# Altium PCB MCU.PcbDoc
Units mm, origin at the board's own origin, x right, y up, seen from the top; angles counter-clockwise.
Board outline 47.6 x 56 mm, 2 copper layers (Top Layer, Bottom Layer); 70 components, 74 nets, 262 pads, 137 vias.
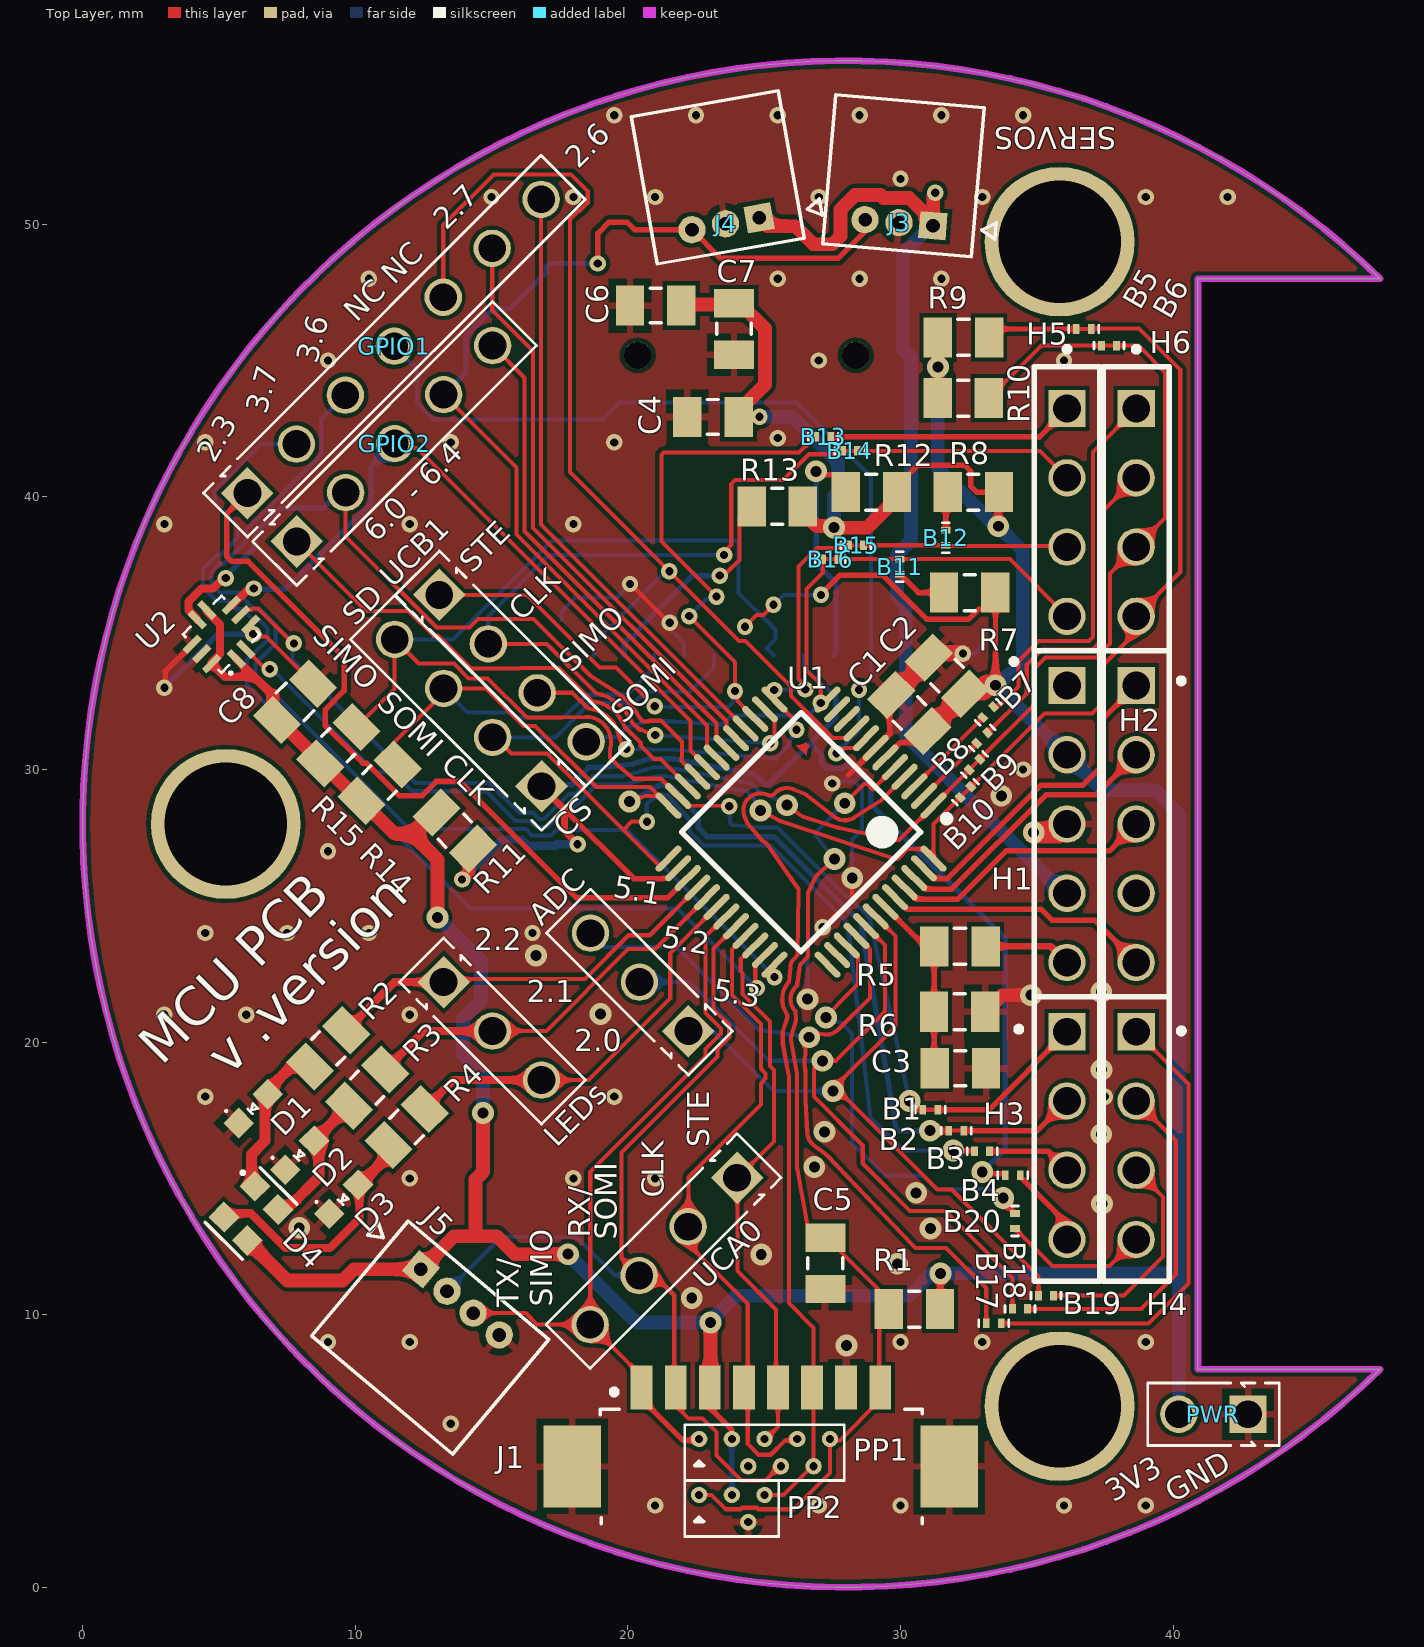
[diagram p0: Top Layer view]
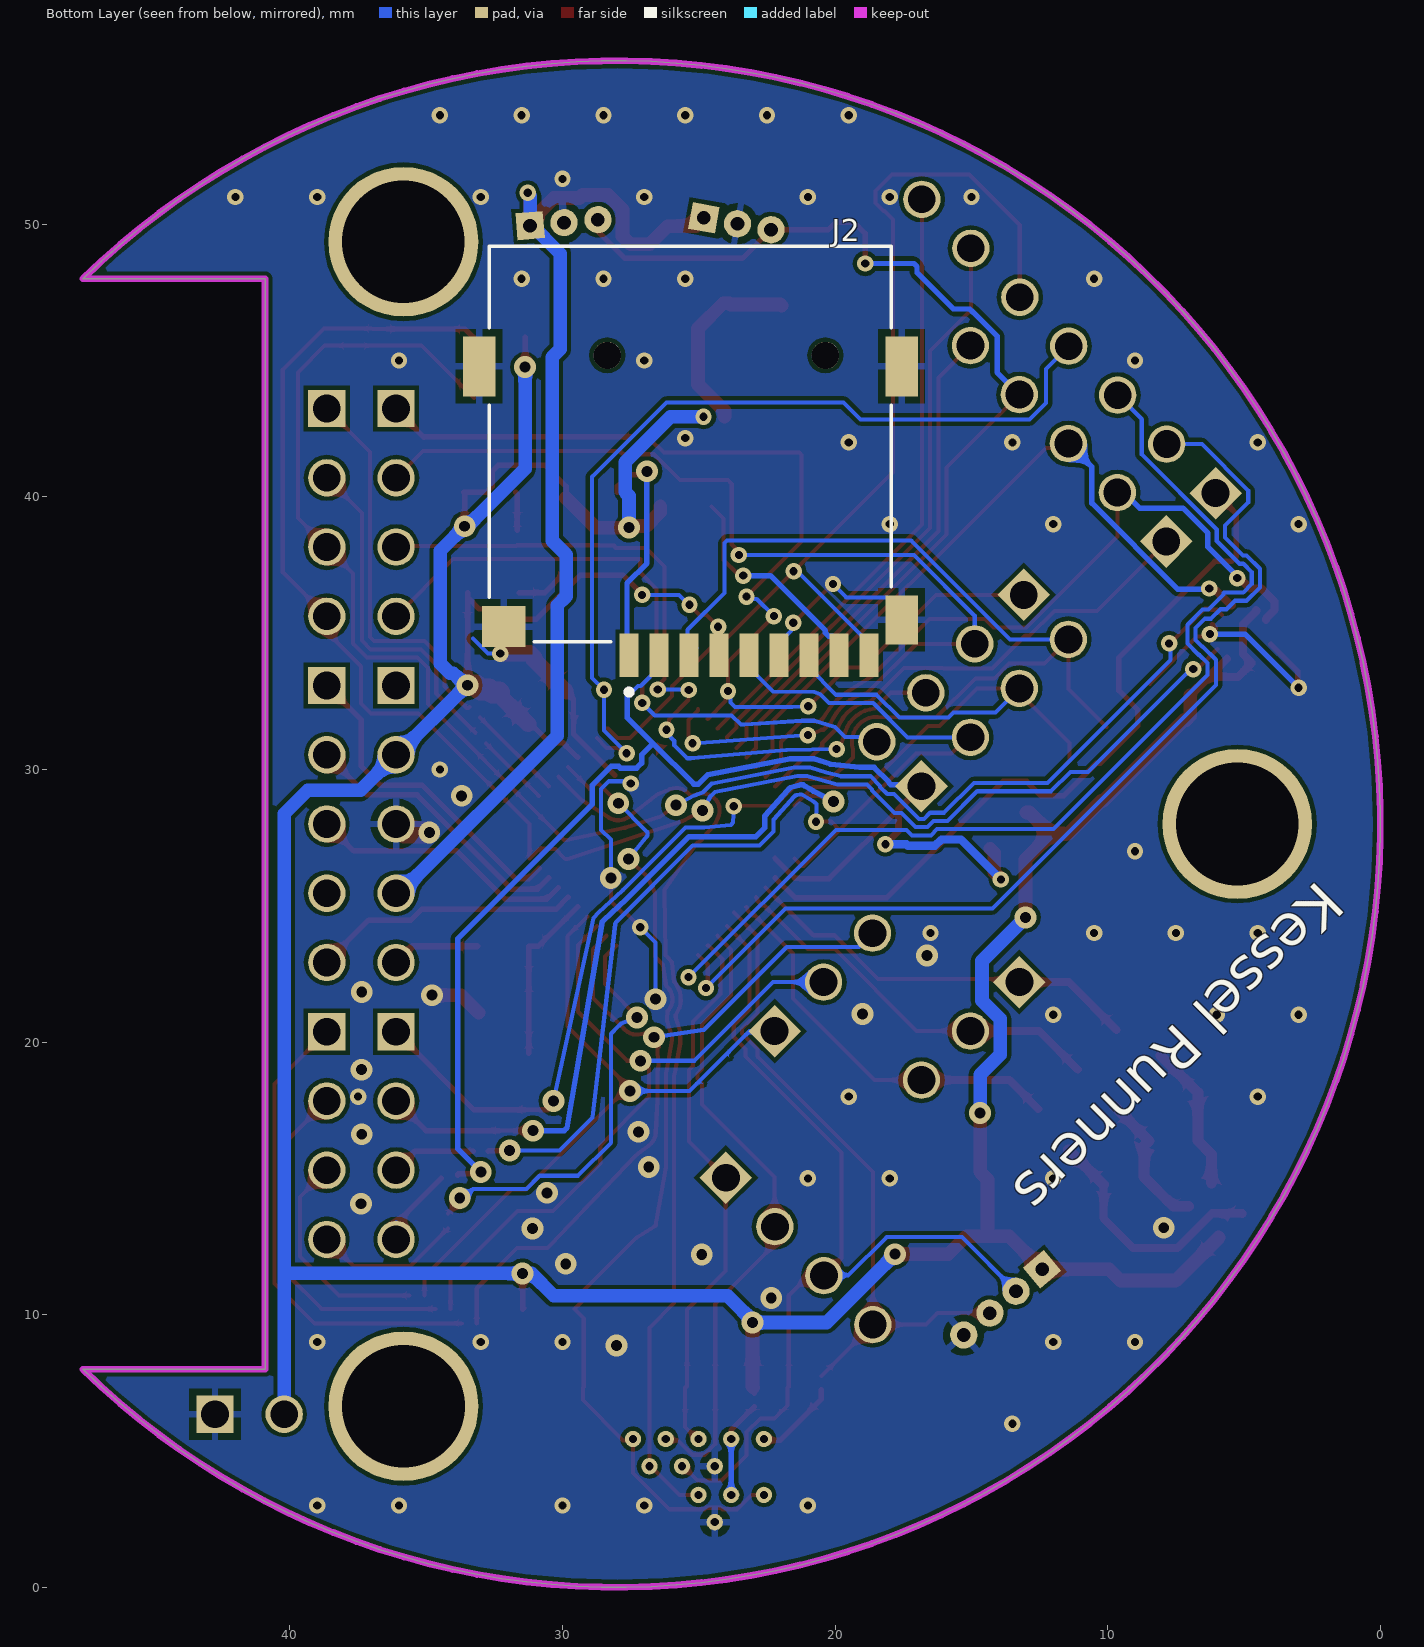
[diagram p1: Bottom Layer view, seen from below]

## Layer stack, top to bottom
Top Solder: solder mask 0.0102, Solder Resist, Dk 3.5
Top Layer: signal copper 0.0356
Dielectric 1: dielectric 0.32, FR-4, Dk 4.8
Bottom Layer: signal copper 0.0356
Bottom Solder: solder mask 0.0102, Solder Resist, Dk 3.5

## Board outline
47.596,8 cw(c28,28) 47.596,48 47.6,48 40.913,48 40.913,8

## Design rules (kind name [scope] priority, off if disabled: settings)
Clearance [All] p1: gap=0.152 ignorepadtopadclearanceinfootprint=FALSE
HoleSize [All] p1: absolutevalues=TRUE maxlimit=6.2 minlimit=0.3 maxpercent=80.000 minpercent=20.000
MinimumAnnularRing [All] p1: minimumring=0.15
MinimumSolderMaskSliver [All] p1: minsoldermaskwidth=0.1
PolygonConnect ViaConnect [IsVia] p1: connectstyle=Direct reliefconductorwidth=0.254 reliefentries=4 polygonreliefangle="90 Angle" airgapwidth=0.254
PolygonConnect [All] p2: connectstyle=Relief reliefconductorwidth=0.254 reliefentries=4 polygonreliefangle="90 Angle" airgapwidth=0.254
RoutingVias [All] p1: holewidth=0.3 width=0.6 viastyle="Through Hole" minholewidth=0.3 minwidth=0.5 maxholewidth=1 maxwidth=5
SilkToSilkClearance [All] p1: silktosilkclearance=0.1
SilkToSolderMaskClearance [IsPad] p1: minsilkscreentomaskgap=0.1 clearancetoexposedcopper=TRUE
SolderMaskExpansion [All] p1: expansion=0.051 istentingtop=FALSE
SupplyNets "Schematic Supply Nets_4" [InNet('1V8')] p1: voltage=0.000
SupplyNets "Schematic Supply Nets_3" [InNet('Vbat')] p2: voltage=0.000
SupplyNets "Schematic Supply Nets_2" [InNet('3V3')] p3: voltage=0.000
SupplyNets "Schematic Supply Nets_1" [InNet('5V')] p4: voltage=0.000
SupplyNets "Schematic Supply Nets" [InNet('GND')] p5: voltage=0.000
Width [All] p1: maxlimit=25.4 minlimit=0.15 preferedwidth=0.3
26 further rules are at their usual default settings.

## Components (designator, comment, footprint, x,y, rotation, side; value= is the part's Value field where it differs from the comment)
ADC "HDR,2.54mm,1x3" HEADER_2.54MM_1x3PIN 20.426,22.199 r135 top
B1 "Solder Jumper Normally Closed 0201" "SOLDER BRIDGE CLOSED 0201" 31.089,17.517 r0 top net-tie
B2 "Solder Jumper Normally Closed 0201" "SOLDER BRIDGE CLOSED 0201" 32.044,16.75 r0 top net-tie
B3 "Solder Jumper Normally Open 0201" "SOLDER BRIDGE OPEN 0201" 32.995,15.99 r0 top
B4 "Solder Jumper Normally Open 0201" "SOLDER BRIDGE OPEN 0201" 34.119,15.118 r0 top
B5 "Solder Jumper Normally Closed 0201" "SOLDER BRIDGE CLOSED 0201" 36.726,46.158 r180 top net-tie
B6 "Solder Jumper Normally Closed 0201" "SOLDER BRIDGE CLOSED 0201" 37.652,45.547 r0 top net-tie
B7 "Solder Jumper Normally Open 0201" "SOLDER BRIDGE OPEN 0201" 33.217,32.101 r225 top
B8 "Solder Jumper Normally Open 0201" "SOLDER BRIDGE OPEN 0201" 32.998,31.153 r225 top
B9 "Solder Jumper Normally Closed 0201" "SOLDER BRIDGE CLOSED 0201" 32.714,30.183 r225 top net-tie
B10 "Solder Jumper Normally Closed 0201" "SOLDER BRIDGE CLOSED 0201" 32.385,29.169 r45 top net-tie
B11 "Solder Jumper Normally Open 0201" "SOLDER BRIDGE OPEN 0201" 29.979,37.438 r270 top
B12 "Solder Jumper Normally Open 0201" "SOLDER BRIDGE OPEN 0201" 31.668,38.5 r270 top
B13 "Solder Jumper Normally Open 0201" "SOLDER BRIDGE OPEN 0201" 27.168,42.21 r0 top
B14 "Solder Jumper Normally Closed 0201" "SOLDER BRIDGE CLOSED 0201" 28.147,41.684 r0 top net-tie
B15 "Solder Jumper Normally Closed 0201" "SOLDER BRIDGE CLOSED 0201" 28.372,38.222 r0 top net-tie
B16 "Solder Jumper Normally Closed 0201" "SOLDER BRIDGE CLOSED 0201" 27.425,37.72 r0 top net-tie
B17 "Solder Jumper Normally Open 0201" "SOLDER BRIDGE OPEN 0201" 33.423,9.683 r0 top
B18 "Solder Jumper Normally Open 0201" "SOLDER BRIDGE OPEN 0201" 34.388,10.212 r0 top
B19 "Solder Jumper Normally Open 0201" "SOLDER BRIDGE OPEN 0201" 35.341,10.703 r0 top
B20 "Solder Jumper Normally Open 0201" "SOLDER BRIDGE OPEN 0201" 34.202,13.437 r270 top
C1 "100nF" CAPACITOR_0805_2012M-70N 30.326,32.071 r315 top
C2 "22uF" CAPACITOR_0805_2012M-70N 31.705,33.443 r315 top
C3 "100nF" CAPACITOR_0805_2012M-70N 32.198,19.041 r180 top
C4 "22uF" CAPACITOR_0805_2012M-70N 23.121,42.937 r0 top
C5 "1nF" CAPACITOR_0805_2012M-70N 27.242,11.884 r90 top
C6 "22uF" CAPACITOR_0805_2012M-70N 21.018,47.016 r0 top
C7 "22uF" CAPACITOR_0805_2012M-70N 23.893,46.159 r90 top
C8 "0.1uF" CAPACITOR_0805_2012M-70N 7.79,32.481 r225 top
D1 "LTST-C190 Series" LED_0603_1608M_0.80MM 6.254,17.561 r45 top
D2 "LTST-C190 Series" LED_0603_1608M_0.80MM 7.958,15.846 r45 top
D3 "LTST-C190 Series" LED_0603_1608M_0.80MM 9.572,14.23 r45 top
D4 "B38G3RGB-10D0003H2U1930" LED_B38G3RGB-10D0003H2U1930_0606_1616M 6.177,13.718 r315 top
GPIO1 "HDR,2.54mm,1x7" HEADER_2.54MM_1x7PIN 11.432,45.527 r45 top
GPIO2 "HDR,2.54mm,1x5" HEADER_2.54MM_1x5PIN 11.445,41.955 r45 top
H1 "SSQ-105-03-S-S" SAMTEC_SSQ-105-03-S-S 36.107,28 r270 top
H2 "SSQ-105-03-S-S" SAMTEC_SSQ-105-03-S-S 38.647,28 r270 top
H3 "SSQ-104-02-S-S" *SAMTEC_SSQ-104-02-S-S_SSQ-104-02-S-S(Primary) 36.107,16.57 r270 top
H4 "SSQ-104-02-S-S" *SAMTEC_SSQ-104-02-S-S_SSQ-104-02-S-S(Primary) 38.647,16.57 r270 top
H5 "SSQ-104-02-S-S" *SAMTEC_SSQ-104-02-S-S_SSQ-104-02-S-S(Primary) 36.107,39.43 r270 top
H6 "SSQ-104-02-S-S" *SAMTEC_SSQ-104-02-S-S_SSQ-104-02-S-S(Primary) 38.647,39.43 r270 top
J1 "0532610871" MOLEX_0532610871 25.505,4.931 r0 top
J2 "MSD-4-A" CUI_MSD-4-A 25.311,41.939 r0 bottom
J3 "0530480310" MOLEX_0530480310 29.947,50.06 r355 top
J4 "0530480310" MOLEX_0530480310 23.582,50.016 r10 top
J5 "0530480410" MOLEX_0530480410 13.844,10.459 r140 top
LEDs "HDR,2.54mm,1x3" HEADER_2.54MM_1x3PIN 15.037,20.403 r315 top
PP1 "Headerless Pogo Holes 8-pin" POGO_8_PIN_HEADER 25.015,4.941 r0 top
PP2 "Headerless Pogo Holes 4-pin" POGO_4_PIN_HEADER 23.815,2.891 r0 top
PWR "HDR,2.54mm,1x2" HEADER_2.54MM_1x2PIN 41.48,6.348 r180 top
R1 "47k" RESISTOR_0805_2012M-50N 30.51,10.203 r0 top
R2 "1K" RESISTOR_0805_2012M-50N 9.005,19.772 r225 top value=1k
R3 "1K" RESISTOR_0805_2012M-50N 10.439,18.328 r225 top value=1k
R4 "1K" RESISTOR_0805_2012M-50N 11.884,16.885 r225 top value=1k
R5 "47k" RESISTOR_0805_2012M-50N 32.183,23.513 r0 top
R6 "47k" RESISTOR_0805_2012M-50N 32.169,21.113 r180 top
R7 "4.7k" RESISTOR_0805_2012M-50N 32.536,36.49 r0 top
R8 "4.7k" RESISTOR_0805_2012M-50N 32.672,40.174 r0 top
R9 "4.7k" RESISTOR_0805_2012M-50N 32.312,45.849 r180 top
R10 "4.7k" RESISTOR_0805_2012M-50N 32.304,43.624 r180 top
R11 "4.7k" Resistor_0805_2012M-50N 13.649,27.756 r135 top
R12 "4.7k" Resistor_0805_2012M-50N 28.932,40.174 r0 top
R13 "4.7k" Resistor_0805_2012M-50N 25.481,39.649 r0 top
R14 "4.7k" Resistor_0805_2012M-50N 10.893,29.52 r225 top
R15 "4.7k" Resistor_0805_2012M-50N 9.38,30.89 r225 top
SD "HDR,2.54mm,1x4" HEADER_2.54MM_1x4PIN 14.139,32.077 r135 top (schematic designator UCA1)
U1 "MSP430FR2355TPT" PT0048A_L 26.352,27.7 r225 top
U2 "BMP390" BMP390 5.091,34.956 r225 top
UCA0 "HDR,2.54mm,1x4" HEADER_2.54MM_1x4PIN 21.313,12.331 r225 top
UCB1 "HDR,2.54mm,1x4" HEADER_2.54MM_1x4PIN 15.777,33.711 r315 top

## Footprints (in the part's own frame and the unit in brackets; to place one, negate y for a bottom-side part, rotate by r counter-clockwise, add the part's x,y. Pads: shape width x height; smd on the part's side, far side on the other; paste and mask are expansions set on the pad)
*SAMTEC_SSQ-104-02-S-S_SSQ-104-02-S-S(Primary) [mm]
  rect 1.37x1.37 hole 1.02: 01(-3.81,0)
  round 1.37 hole 1.02: 02(-1.27,0) 03(1.27,0) 04(3.81,0)
  silkscreen extent -5.34,-1.87 5.34,1.2
BMP390 [mm]
  rect 0.25x0.775 smd mask+0.051: 1(0.25,1.013) 2(-0.25,1.013) 6(-0.25,-1.013) 7(0.25,-1.013)
  rect 0.775x0.25 smd mask+0.051: 3(-1.013,0.5) 4(-1.013,0) 5(-1.013,-0.5) 8(1.013,-0.5) 9(1.013,0) 10(1.013,0.5)
  silkscreen extent -1,-1 1,1.29, body extent -1,-1 1,1, height 0.8
CAPACITOR_0805_2012M-70N [mm] "Capacitor, 0805 (2012 metric), 0.7mm high, nominal pads,"
  rect 1.04x1.47 smd mask+0.051: 1(-0.94,0) 2(0.94,0)
  silkscreen extent -0.2,-0.63 0.2,0.63, body extent -1,-0.73 1,0.73, height 1.23
CUI_MSD-4-A [mm]
  rect 0.7x1.6 smd: 1(2.25,7.75) 2(1.15,7.75) 3(0.05,7.75) 4(-1.05,7.75) 5(-2.15,7.75) 6(-3.25,7.75) 7(-4.35,7.75) 8(-5.45,7.75) CD(-6.55,7.75)
  rect 1.2x1.8 smd: G1(-7.75,6.45)
  rect 1.6x1.5 smd: G2(6.85,6.7)
  rect 1.2x2.2 smd: G3(-7.75,-2.85) G4(7.75,-2.85)
  round 1 hole 1 unplated: ""(-4.95,-3.25) ""(3.05,-3.25)
  silkscreen extent -7.37,-7.25 7.37,9.2, body extent -8.07,-7.37 8.07,7.68, height 1.8
HEADER_2.54MM_1x2PIN [mm]
  rect 1.37x1.37 hole 1.02: 1(-1.27,0)
  round 1.37 hole 1.02: 2(1.27,0)
  silkscreen extent -2.41,-1.14 2.41,1.14, body extent -2.41,-1.14 2.41,1.14, height 8.2
HEADER_2.54MM_1x3PIN [mm]
  rect 1.37x1.37 hole 1.02: 1(-2.54,0)
  round 1.37 hole 1.02: 2(0,0) 3(2.54,0)
  silkscreen extent -3.68,-1.14 3.68,1.14, body extent -3.73,-1.19 3.73,1.19
HEADER_2.54MM_1x4PIN [mm]
  rect 1.37x1.37 hole 1.02: 1(-3.81,0)
  round 1.37 hole 1.02: 2(-1.27,0) 3(1.27,0) 4(3.81,0)
  silkscreen extent -4.95,-1.14 4.95,1.14, body extent -5,-1.19 5,1.19
HEADER_2.54MM_1x5PIN [mm]
  rect 1.37x1.37 hole 1.02: 1(-5.08,0)
  round 1.37 hole 1.02: 2(-2.54,0) 3(0,0) 4(2.54,0) 5(5.08,0)
  silkscreen extent -6.22,-1.14 6.22,1.14, body extent -6.27,-1.19 6.27,1.19
HEADER_2.54MM_1x7PIN [mm]
  rect 1.37x1.37 hole 1.02: 1(-7.62,0)
  round 1.37 hole 1.02: 2(-5.08,0) 3(-2.54,0) 4(0,0) 5(2.54,0) 6(5.08,0) 7(7.62,0)
  silkscreen extent -8.76,-1.14 8.76,1.14, body extent -8.81,-1.19 8.81,1.19
LED_0603_1608M_0.80MM [mm] "LED, 0603 (1608 metric), 0.8mm high"
  rect 0.8x0.8 smd mask+0.051: A(0.75,0) C(-0.75,0)
  silkscreen extent -0.79,-0.12 0.13,0.66, body extent -0.8,-0.4 0.8,0.4, height 0.8
LED_B38G3RGB-10D0003H2U1930_0606_1616M [mm] "RGB LED, 0606 (1616 metric), 0.4mm high"
  rect 0.813x0.8 smd mask+0.051: 1(-0.602,0.8) 2(0.602,0.8) 3(0.602,-0.8) 4(-0.602,-0.8)
  silkscreen extent -1.3,-1.42 0.97,1.42, body extent -0.8,-0.8 0.8,0.8, height 0.4
MOLEX_0530480310 [mm] "Header - Picoblade 03-pin, TH, RA, 4.2mm height"
  rect 1x1 hole 0.5 mask+0.051: 1(1.25,0)
  round 1 hole 0.5 mask+0.051: 2(0,0) 3(-1.25,0)
  silkscreen extent -2.73,-1.02 3.55,4.47, body extent -2.74,-1.04 2.76,4.46, height 3.51
MOLEX_0530480410 [mm]
  rect 1x1 hole 0.5 mask+0.051: 1(1.875,0)
  round 1 hole 0.5 mask+0.051: 2(0.625,0) 3(-0.625,0) 4(-1.875,0)
  silkscreen extent -3.38,-1.05 4.18,4.45, body extent -3.37,-1.03 3.37,4.48, height 3.56
MOLEX_0532610871 [mm] "Header - Picoblade 08-pin, SMT, RA, 3.4mm height"
  rect 0.8x1.6 smd mask+0.051: 1(-5,2.4) 2(-3.75,2.4) 3(-2.5,2.4) 4(-1.25,2.4) 5(0,2.4) 6(1.25,2.4) 7(2.5,2.4) 8(3.75,2.4)
  rect 2.1x3 smd mask+0.051: MP1(-7.55,-0.5) MP2(6.28,-0.5)
  silkscreen extent -6.52,-2.6 5.29,2.33
POGO_4_PIN_HEADER [mm] "4-pin header for pogo pins"
  round 0.6 hole 0.3 mask+0.051: 1(-1.2,0.5) 2(0,0.5) 3(0.6,-0.5) 4(1.2,0.5)
  silkscreen extent -1.73,-1.02 1.72,1.03
POGO_8_PIN_HEADER [mm] "8-pin header for pogo pins"
  round 0.6 hole 0.3 mask+0.051: 1(-2.4,0.5) 2(-1.2,0.5) 3(-0.6,-0.5) 4(0,0.5) 5(0.6,-0.5) 6(1.2,0.5) 7(1.8,-0.5) 8(2.4,0.5)
  silkscreen extent -2.93,-1.02 2.93,1.03
PT0048A_L [mm]
  oval 1.25x0.25 smd paste+0 mask+0.051: 1(-4.125,2.75) 2(-4.125,2.25) 3(-4.125,1.75) 4(-4.125,1.25) 5(-4.125,0.75) 6(-4.125,0.25) 7(-4.125,-0.25) 8(-4.125,-0.75) 9(-4.125,-1.25) 10(-4.125,-1.75) 11(-4.125,-2.25) 12(-4.125,-2.75) 25(4.125,-2.75) 26(4.125,-2.25) 27(4.125,-1.75) 28(4.125,-1.25) 29(4.125,-0.75) 30(4.125,-0.25) 31(4.125,0.25) 32(4.125,0.75) 33(4.125,1.25) 34(4.125,1.75) 35(4.125,2.25) 36(4.125,2.75)
  oval 0.25x1.25 smd paste+0 mask+0.051: 13(-2.75,-4.125) 14(-2.25,-4.125) 15(-1.75,-4.125) 16(-1.25,-4.125) 17(-0.75,-4.125) 18(-0.25,-4.125) 19(0.25,-4.125) 20(0.75,-4.125) 21(1.25,-4.125) 22(1.75,-4.125) 23(2.25,-4.125) 24(2.75,-4.125) 37(2.75,4.125) 38(2.25,4.125) 39(1.75,4.125) 40(1.25,4.125) 41(0.75,4.125) 42(0.25,4.125) 43(-0.25,4.125) 44(-0.75,4.125) 45(-1.25,4.125) 46(-1.75,4.125) 47(-2.25,4.125) 48(-2.75,4.125)
  silkscreen extent -4.25,-3.1 3.1,3.55, body extent -4.5,-4.5 4.5,4.5, height 1.6
RESISTOR_0805_2012M-50N [mm] "Resistor, 0805 (2012 metric), nominal pads"
  rect 1.04x1.47 smd mask+0.051: 1(-0.94,0) 2(0.94,0)
  silkscreen extent -0.2,-0.66 0.2,0.66, body extent -1,-0.63 1,0.62, height 0.5
Resistor_0805_2012M-50N [mm] "Resistor, 0805 (2012 metric), nominal pads"
  rect 1.04x1.47 smd mask+0.051: 1(-0.94,0) 2(0.94,0)
  silkscreen extent -0.2,-0.66 0.2,0.66, body extent -1,-0.63 1,0.62, height 0.5
SAMTEC_SSQ-105-03-S-S [mm]
  rect 1.37x1.37 / inner round 1.37 / far side rect 1.37x1.37 hole 1.02: 1(-5.08,0)
  round 1.37 hole 1.02: 2(-2.54,0) 3(0,0) 4(2.54,0) 5(5.08,0)
  silkscreen extent -6.36,-2.05 6.33,1.2, body extent -6.6,-1.21 6.6,1.21, height 8.51
"SOLDER BRIDGE CLOSED 0201" [mm]
  rect 0.25x0.35 smd paste-100 mask+0: 1(-0.275,0) 2(0.275,0)
  Top Layer lines w0.15: -0.225,0 0.225,0
  silkscreen extent -0.55,-0.13 0.55,0.13
"SOLDER BRIDGE OPEN 0201" [mm]
  rect 0.25x0.35 smd paste-100 mask+0: 1(-0.275,0) 2(0.275,0)
  silkscreen extent -0.55,-0.13 0.55,0.13

## Part data
ADC LEDs: "Connector - 2.54mm, 1x3-pin"
C1 C3: library part "Generic Capacitor", "Generic Capacitor", Capacitance at Rated Voltage=40%, MF Part No.=C0805C104K5RAC7800, Package=0805, Rated Voltage=50V, Supplier 1 Part No.=399-C0805C104K5RAC7800CT-ND, Temperature Coefficient=X7R, Temp Range="-55°C ~ 125°C", Tolerance=±10%, Supplier 1=Digikey
C2: library part C0805C226M9PACTU, "Passive - Capacitor, X5R, 22uF Max, 6.3V, 0805 (2012 Metric), ±20%, -55°C ~ 85°C. 8.8uF @ 5V", Capacitance at Rated Voltage=30%, Package=0402, Rated Voltage=6.3V, Supplier 1 Part No.=399-C0805C226M9PAC7800CT-ND, Temperature Coefficient=X5R, Temp Range="-55°C ~ 85°C", Tolerance=±20%, APSS Standard Part="APSS Standard", MF Part No.=C0805C226M9PACTU, Supplier 1=Digikey
C4 C6 C7: library part GRM21BR61C226ME44L, "Passive - Capacitor, X5R, 22uF Max, 16V, 0805 (2012 Metric), ±20%, -55°C ~ 85°C. 9.4uF @ 5V, 3.2uF @ 15V, 1.9uF @ 25V", Capacitance at Rated Voltage=10%, Package=0805, Rated Voltage=16V, Supplier 1 Part No.=490-10747-1-ND, Temp Range="-55°C ~ 85°C", Temperature Coefficient=X5R, Tolerance=±20%, APSS Standard Part="APSS Standard", MF Part No.=GRM21BR61C226ME44L, Supplier 1=Digikey
C5: library part "Generic Capacitor", "Generic Capacitor", Capacitance at Rated Voltage=100%, MF Part No.=399-C0805C102J5GAC7800CT-ND, Package=0805, Rated Voltage=50V, Temperature Coefficient=X7R, Temp Range="-55°C ~ 125°C", Tolerance=±5%, Supplier 1=Digikey, Supplier 1 Part No.=399-C0805C102J5GAC7800CT-ND
C8: library part "Generic Capacitor", "Generic Capacitor", Capacitance at Rated Voltage=40%, MF Part No.=C0805C104K5RAC7800, Package=0805, Rated Voltage=50V, Supplier 1 Part No.=399-C0805C104K5RAC7800CT-ND, Temp Range="-55°C ~ 125°C", Temperature Coefficient=X7R, Tolerance=±10%, Supplier 1=Digikey
D1: "Diode - LED, 0603", Colour=Green, MF Part No.=LTST-C190KGKT, Package=0603, Rated Voltage="5V Reverse", Temp Range="-30°C ~ 85°C", APSS Standard Part="APSS Standard", Supplier 1=Digikey
D2: "Diode - LED, 0603", Colour=Yellow, MF Part No.=LTST-C190KSKT, Package=0603, Rated Voltage="5V Reverse", Temp Range="-30°C ~ 85°C", APSS Standard Part="APSS Standard", Supplier 1=Digikey
D3: "Diode - LED, 0603", Colour=Red, MF Part No.=LTST-C190KAKT, Package=0603, Rated Voltage="5V Reverse", Temp Range="-30°C ~ 85°C", APSS Standard Part="APSS Standard", Supplier 1=Digikey
D4: "Diode - LED, RGB, 2V Red, 3V Green, 3V Blue 0606 (1616 Metric)", Package=0606, Supplier 1 Part No.=3147-B38G3RGB-10D0003H2U1930CT-ND, Temp Range="-40°C ~ 85°C", APSS Standard Part="APSS Standard", MF Part No.=B38G3RGB-10D0003H2U1930, Supplier 1=Digikey
GPIO1: "Connector - 2.54mm, 1x7-pin"
GPIO2: "Connector - 2.54mm, 1x5-pin"
J1: "Header - Picoblade 08-pin, SMT, RA", Supplier 1 Part No.=WM7626CT-ND, APSS Standard Part="APSS Standard", MF Part No.=0532610871, Mounting Type="Surface Mount", Orientation="Right Angle", Pins=8, Pitch=1.25mm, Supplier 1=Digikey
J2: "Micro SD Card Connector, 9 Positions, Connector and Ejector, Push In, Auto Eject Out, Surface Mount, 1.8 mm Height Above Board, Gold Flash", Package=None, Check_prices=https://www.snapeda.com/parts/MSD-4-A/Same+Sky/view-part/?ref=eda, MF="Same Sky", MP=MSD-4-A, SnapEDA_Link=https://www.snapeda.com/parts/MSD-4-A/Same+Sky/view-part/?ref=snap
J3 J4: "Header - Picoblade 03-pin, TH, RA", Supplier 1 Part No.=WM1743-ND, APSS Standard Part="APSS Standard", MF Part No.=0530480310, Mounting Type=Through-hole, Orientation="Right Angle", Pins=3, Pitch=1.25mm, Supplier 1=Digikey
J5: "Header - Picoblade 04-pin, TH, RA", Supplier 1 Part No.=WM1744-ND, APSS Standard Part="APSS Standard", MF Part No.=0530480410, Mounting Type=Through-hole, Orientation="Right Angle", Pins=4, Pitch=1.25mm, Supplier 1=Digikey
PWR: "Connector - 2.54mm, 1x2-pin"
R1 R6: library part "RMCF0805JT Series", "Passive - Resistor Series, 0805, 5%, 100m - 22M, E24, 0.063W, 1/16W, ±200ppm/°C, -55°C ~ 155°C, 0805 (2012 Metric)", MF Part No.=RMCF0805JT47K0, Package=0805, Power=1/8W, Rated Voltage=150V, Temp Range="-55°C ~ 155°C", Temperature Coefficient=±200ppm/°C, Tolerance=5%, Value Range="100m ~ 22M", APSS Standard Part="APSS Standard", E Series=E24, Supplier 1=Digikey
R2 R3 R4: library part "RMCF0805JT Series", "Passive - Resistor Series, 0805, 5%, 100m - 22M, E24, 0.063W, 1/16W, ±200ppm/°C, -55°C ~ 155°C, 0805 (2012 Metric)", MF Part No.=RMCF0805JT1K00, Package=0805, Power=1/8W, Rated Voltage=150V, Temperature Coefficient=±200ppm/°C, Temp Range="-55°C ~ 155°C", Tolerance=5%, Value Range="100m ~ 22M", APSS Standard Part="APSS Standard", E Series=E24, Supplier 1=Digikey
R5: library part "RMCF0805JT Series", "Passive - Resistor Series, 0805, 5%, 100m - 22M, E24, 0.063W, 1/16W, ±200ppm/°C, -55°C ~ 155°C, 0805 (2012 Metric)", MF Part No.=RMCF0805JT147K0, Package=0805, Power=1/8W, Rated Voltage=150V, Temp Range="-55°C ~ 155°C", Temperature Coefficient=±200ppm/°C, Tolerance=5%, Value Range="100m ~ 22M", APSS Standard Part="APSS Standard", E Series=E24, Supplier 1=Digikey
R7 R8 R9 R10: library part "RMCF0805JT Series", "Passive - Resistor Series, 0805, 5%, 100m - 22M, E24, 0.063W, 1/16W, ±200ppm/°C, -55°C ~ 155°C, 0805 (2012 Metric)", MF Part No.=RMCF0805JT4K70, Package=0805, Power=1/8W, Rated Voltage=150V, Temperature Coefficient=±200ppm/°C, Temp Range="-55°C ~ 155°C", Tolerance=5%, Value Range="100m ~ 22M", APSS Standard Part="APSS Standard", E Series=E24, Supplier 1=Digikey
R11 R12 R13 R14 R15: library part "RMCF0805JT Series", "Passive - Resistor Series, 0805, 5%, 100m - 22M, E24, 0.063W, 1/16W, ±200ppm/°C, -55°C ~ 155°C, 0805 (2012 Metric)", MF Part No.=RMCF0805JT1K00, Package=0805, Power=1/8W, Rated Voltage=150V, Temp Range="-55°C ~ 155°C", Temperature Coefficient=±200ppm/°C, Tolerance=5%, Value Range="100m ~ 22M", APSS Standard Part="APSS Standard", E Series=E24, Supplier 1=Digikey
SD UCA0 UCB1: "Connector - 2.54mm, 1x4-pin"
U1: library part MSP430FR2355IPT, Package=LQFP-48, Rated Voltage="1.8V ~ 3.6V", Supplier 1 Part No.=296-50260-ND, Temp Range="-40°C ~ 105°C (TA)", APSS Standard Part="APSS Standard", MF Part No.=MSP430FR2355TPT, Supplier 1=Digikey
U2: "Digital Pressure Sensor", Package=LGA, Supplier 1 Part No.=828-BMP390CT-ND, Temp Range="-40°C ~ 85°C", APSS Standard Part="APSS Standard", MF Part No.=BMP390, Pins=10, Pressure Range="30 kPa ~ 125 kPa", Supplier 1=Digikey
B1 B2 B3 B4 B5 B6 B7 B8 B9 B10 B11 B12 B13 B14 B15 B16 B17 B18 B19 B20: DEBUG=DEBUG
H1 H2: MP=SSQ-105-03-S-S

## Free pads (board coordinates)
  round 5.5 hole 4.5: 1(5.25,28) 1(35.837,6.643) 1(35.837,49.357)

## Via types
v1: diameter 0.6, hole 0.3, Top Layer to Bottom Layer, tented top, 55 vias
v2: diameter 0.8, hole 0.4, Top Layer to Bottom Layer, tented both sides, 44 vias
v3: diameter 0.6, hole 0.3, Top Layer to Bottom Layer, 21 vias
v4: diameter 0.6, hole 0.3, Top Layer to Bottom Layer, tented both sides, 17 vias

## Nets (pads, with @x,y where several pads share a name; then routed paths per layer and width w, separated by ;. In a path a pad name is that pad's centre, name@x,y a point inside that pad or via, vN(x,y) a via of type N, cw(c..) or ccw(c..) an arc to the next point about the centre after c; other vN are vias at no path point)
1V8: H1.1
1V8_EN: H2.3 U1.45 | length 9.8
  Top Layer w0.2: U1.45 30.574,25.246 32.102,25.246 33.874,27.018 37.665,27.018 H2.3
1V8_PG: H2.1 U1.47 | length 11.9
  Top Layer w0.2: U1.47 31.237,25.997 31.723,25.997 35.15,29.424 36.689,29.424 37.382,30.118 37.382,31.815 H2.1
3V3: C1.2 C2.2 C4.2 C6.2 C7.2 C8.2 D4.3 H1.2 J1.3 J2.4 J5.1 PP1.2 PP2.2 PWR.2 R1.2 R7.2 R8.2 R9.2 R10.2 R11.2 R12.2 R13.2 R14.2 R15.2 U1.6 U2.1 U2.6 U2.10 | length 168
  Top Layer w0.15: v4(24.295,35.239) 24.727,35.671 24.97,35.671 v4(25.341,36.042)
  Top Layer w0.2: J1.3@22.96,6.625 23.815,5.77 PP1.2 PP1.2@23.815,5.391 ; J1.3@22.96,7.125 J1.3 ; v4(27.083,36.404) 27.083,36.442 27.763,37.123 29.352,37.123 30.972,35.503 32.489,35.503 32.873,35.887 33.056,35.887 33.476,36.307 R7.2@33.476,36.459 ; U1.6 29.993,30.988 30.472,30.988 C1.2@31.138,31.654 ; R12.2@29.872,39.959 R12.2 29.872,40.389 30.644,41.161 32.356,41.161 32.574,40.943 32.574,40.391 32.792,40.174 R8.2 ; C1.2@31.141,31.668 C1.2@31.26,31.668 ; R10.2@31.354,43.624 R10.2@31.362,43.632 ; R9.2@31.362,45.849 R10.2@31.362,43.632 ; v2(31.373,44.764) 31.373,43.643 R10.2@31.362,43.632 ; R1.2@31.46,10.203 31.427,10.236 31.467,10.276 v2(31.467,11.515) ; R7.2 R7.2@33.476,36.459 ; v2(33.485,33.089) 33.485,36.45 R7.2@33.476,36.459 ; v2(33.589,38.921) 33.589,40.141 R8.2@33.622,40.174
  Top Layer w0.3: U2.6 4.551,35.814 5.039,35.326 5.039,34.233 4.728,33.922 U2.10 5.223,33.392 6.302,33.392 ; U2.1 6.302,33.392 ; 6.973,32.72 6.302,33.392
  Top Layer w0.5: D4.3@5.923,12.834 7.502,11.255 9.544,11.255 9.953,11.664 J5.1 13.624,12.881 14.409,12.881 ; 6.973,32.72 6.973,31.969 C8.2 7.196,31.817 10.158,28.855 R14.2 11.446,27.637 12.082,27.637 ; R11.2 12.866,28.421 12.082,27.637 ; v2(13.018,24.574) 13.018,26.702 12.082,27.637 ; v2(14.684,17.404) 14.684,15.239 14.409,14.965 14.409,12.881 ; v2(17.803,12.22) 15.855,12.22 15.195,12.881 14.409,12.881 ; C6.2 22,47.057 23.851,47.057 C7.2 24.108,47.099 25.03,46.176 25.03,44.12 24.061,43.152 C4.2 ; J1.3 23.032,7.357 v2(23.032,9.713) ; R13.2 26.421,39.434 26.924,38.931 27.505,38.931 v2(27.562,38.874) ; v2@27.511,38.822 v2(27.562,38.874) ; R12.2@29.872,39.959 28.787,38.874 v2(27.562,38.874)
  Top Layer w0.6: C1.2@31.26,31.668 C2.2
  Top Layer w0.8: C2.2@32.327,32.82 32.582,32.82 32.691,32.93 33.017,32.93 33.176,33.089 v2(33.485,33.089)
  Bottom Layer w0.15: v4(25.341,36.042) 25.359,36.042 25.721,36.404 v4(27.083,36.404)
  Bottom Layer w0.2: PP2.2 PP1.2@23.815,5.391
  Bottom Layer w0.5: v2(13.018,24.574) 14.612,22.979 14.612,21.515 13.95,20.853 13.95,19.536 14.684,18.802 v2(14.684,17.404) ; v2(17.803,12.22) 20.309,9.713 v2(23.032,9.713) 23.032,9.781 23.948,10.697 30.322,10.697 31.14,11.515 v2(31.467,11.515) 40.205,11.515 40.21,11.52 ; v4(24.829,42.937) 26.038,42.937 27.706,41.269 27.706,40.184 27.562,40.04 v2(27.562,38.874) ; v2(31.373,44.764) 31.373,41.034 33.487,38.921 v2(33.589,38.921) 34.484,38.026 34.484,33.883 34.13,33.53 34.006,33.53 33.566,33.089 v2(33.485,33.089) ; v2@33.608,33.048 33.601,33.041 33.601,33.009 36.07,30.54 H1.2 37.412,29.235 39.35,29.235 40.21,28.375 40.21,11.52 ; PWR.2@40.28,6.278 PWR.2 40.21,11.52
3V3_EN: H2.4
3V3_PG: H2.2 U1.46 | length 10.4
  Top Layer w0.2: U1.46 30.917,25.61 31.875,25.61 35.338,29.072 37.179,29.072 H2.2
5V: H1.4 J3.1 J4.1 | length 39.1
  Top Layer w0.5: J4.1 25.115,49.931 26.143,49.931 26.806,49.268 27.507,49.268 27.8,49.561 27.8,50.542 28.328,51.071 29.27,51.071 29.379,50.962 30.321,50.962 30.901,50.382 30.901,50.242 J3.1 31.198,49.957 31.198,51.05 31.274,51.126 v3(31.274,51.153)
  Bottom Layer w0.5: v3(31.274,51.153) 31.274,51.126 31.179,51.031 31.179,50.015 30.085,48.921 30.085,45.423 30.384,45.124 30.384,38.395 29.871,37.881 29.871,36.348 30.198,36.021 30.198,31.24 35.977,25.46 H1.4
5V_EN: H2.5 U1.44 | length 9.8
  Top Layer w0.2: U1.44 30.247,24.866 35.168,24.866 35.56,24.474 37.116,24.474 H2.5@38.659,22.931
ADC9: ADC.1 B19.1 U1.42 | length 25
  Top Layer w0.153: U1.42 29.813,23.885 29.813,20.579 27.474,18.239 27.506,18.207 v2(27.529,18.207) 27.746,18.207 31.362,14.591 31.88,14.591 35.066,11.405 B19.1
  Bottom Layer w0.153: ADC.1 23.147,20.403 25.343,18.207 v2(27.529,18.207)
ADC10: ADC.2 B18.1 U1.41 | length 27.4
  Top Layer w0.153: v2@27.14,19.318 v2(27.14,19.313) ; U1.41 29.435,23.557 29.435,21.115 27.637,19.318 27.241,19.318 v2(27.14,19.313) ; B18.1 34.113,11.342 31.647,13.808 30.349,13.808 28.614,15.542 28.614,16.21 26.824,18.001 26.824,19.039 26.913,19.129 v2(27.14,19.313)
  Bottom Layer w0.153: ADC.2 22.283,22.199 25.164,19.318 27.136,19.318 v2(27.14,19.313)
ADC11: ADC.3 B17.1 U1.40 | length 29.1
  Top Layer w0.153: v2(26.65,20.176) 26.65,20.19 26.726,20.266 v2@26.681,20.311 ; U1.40 28.881,23.403 28.881,21.62 27.753,20.492 27.73,20.469 27.68,20.426 cw(c27.268,20.901) 27.107,20.293 26.927,20.34 26.74,20.34 v2@26.681,20.311 ; B17.1 33.148,10.97 31.669,12.449 30.551,12.449 30.462,12.539 27.294,15.853 ccw(c26.839,15.418) 27.213,15.924 26.836,16.203 cw(c27.21,16.708) 26.582,16.675 26.518,17.875 26.516,18.858 26.507,18.982 26.478,19.158 26.478,19.348 26.516,19.544 26.516,19.782 26.473,19.824 26.473,20.222 26.563,20.311 v2@26.681,20.311
  Bottom Layer w0.153: ADC.3 19.131,23.493 21.775,23.493 24.777,20.491 24.816,20.452 v2(26.65,20.176)
GND: C1.1 C2.1 C3.1 C4.1 C5.1 C6.1 C7.1 C8.1 D1.C D2.C D3.C H1.3 J1.7 J1.MP1 J1.MP2 J2.6 J2.G1 J2.G2 J2.G3 J2.G4 J3.2 J4.2 J5.4 PP1.3 PP2.3 PWR.1 R6.1 U1.7 U2.3 U2.8 U2.9 | length 37.5
  Top Layer w0.15: v3(6.253,34.965) 6.339,34.879 6.721,34.879 C8.1 ; v4(20.08,36.802) 20.098,36.802 21.52,35.38 v4(21.538,35.38) ; v4(27.148,24.209) 27.669,24.73 27.795,24.73 28.229,25.165 v2(28.229,26.022)
  Top Layer w0.2: v1(3,33) 3.027,33.027 3.027,33.6 U2.8 ; U2.3 6.048,35.206 6.048,35.17 v3(6.253,34.965) ; 28.084,29.786 U1.7 29.599,31.301 29.599,32.581 C1.1@29.905,32.887
  Top Layer w0.5: R6.1@33.078,21.073 33.726,21.721 v2(34.792,21.721)
  Top Layer w0.6: C1.1@29.905,32.887 C2.1@31.083,34.065 ; C2.1 31.192,34.259 32.278,34.259 v4(32.288,34.25)
  Top Layer w0.8: v2(34.887,27.685) 35.792,27.685 H1.3
  Bottom Layer w0.15: J2.G1 17.561,35.789 18.086,36.314 19.592,36.314 v4(20.08,36.802) ; v4(21.538,35.38) 21.624,35.294 21.624,35.075 22.061,34.639 J2.6 ; v2(26.594,21.574) 26.594,23.655 v4(27.148,24.209) ; v4(27.499,29.483) 27.585,29.569 28.301,29.569 28.582,29.288 28.582,27.786 28.229,27.434 v2(28.229,26.022) ; v4(32.288,34.25) 32.732,34.25 33.282,34.8
  Bottom Layer w0.2: v1(3,33) 4.965,34.965 v3(6.253,34.965)
  other v1: 21,3 27,3 30,3 36,3 39,3 13.5,6 9,9 12,9 30,9 33,9 39,9 12,15 18,15 21,15 4.5,18 19.5,18 37.5,18 3,21 6,21 12,21 4.5,24 7.5,24 10.5,24 16.5,24 9,27 34.5,30 3,39 12,39 18,39 4.5,42 13.5,42 19.5,42 25.5,42.157 9,45 27,45 36,45 10.5,48 25.5,48 28.5,48 31.5,48 15,51 18,51 21,51 27,51 33,51 39,51 42,51 30,51.664 19.5,54 22.5,54 25.5,54 28.5,54 31.5,54 34.5,54
  other v2: 28.015,8.873 22.343,10.613 29.884,11.866 24.894,12.212 31.099,13.157 7.947,13.188 37.388,14.068 30.575,14.471 26.839,15.418 37.365,16.618 27.21,16.708 37.376,18.987 18.992,21.031 37.365,21.841 16.634,23.175 33.7,29.034
GPIO2.3: GPIO1.1 U1.27 | length 27.9
  Top Layer w0.2: GPIO1.1 5.284,39.379 5.284,37.812 5.465,37.631 6.068,37.631 9.594,34.105 9.594,32.889 8.905,32.2 8.905,31.602 10.275,30.232 10.418,30.232 11.605,29.044 12.462,29.044 12.978,29.561 13.835,29.561 18.1,25.296 21.472,25.296 U1.27
GPIO2.7: GPIO1.4 U1.8 | length 32.7
  Top Layer w0.15: v4(27.649,30.598) 27.771,30.598 27.967,30.794 28.385,30.794 U1.8
  Bottom Layer w0.15: GPIO1.4 12.264,44.694 12.264,43.438 12.863,42.839 19.068,42.839 19.693,43.464 26.186,43.464 28.913,40.737 28.913,33.362 v3(28.478,32.927) 28.478,31.427 v4(27.649,30.598)
GPIO3.4: U1.38
GPIO3.6: GPIO1.3 U1.36 | length 38
  Bottom Layer w0.15: GPIO1.3 8.752,42.847 8.752,41.557 6.002,38.807 6.002,38.379 5.17,37.547 5.029,37.547 4.72,37.238 4.72,36.801 5.029,36.492 5.734,36.492 5.75,36.476 5.75,36.422 6.306,35.866 6.526,35.866 7.083,35.309 7.083,34.622 6.669,34.208 6.646,34.208 6.337,33.899 6.337,33.463 11.99,27.81 16.261,27.81 16.489,27.582 17.178,27.582 17.379,27.783 19.975,27.783 v3(25.377,22.383)
GPIO3.7: GPIO1.2 U1.35 | length 38.3
  Top Layer w0.15: v3(24.739,21.985) 24.673,22.05 24.673,22.84 U1.35
  Bottom Layer w0.15: GPIO1.2 6.549,41.935 4.848,40.233 4.848,39.795 5.7,38.943 5.7,38.504 5.044,37.849 4.903,37.849 4.417,37.363 4.417,36.676 4.903,36.189 5.331,36.189 5.643,35.878 5.867,35.878 6.214,35.531 6.433,35.531 6.78,35.184 6.78,34.747 6.544,34.511 6.52,34.511 6.034,34.025 6.034,33.104 14.231,24.907 21.816,24.907 v3(24.739,21.985)
GPIO5.4: B20.1 U1.39 | length 15.5
  Top Layer w0.153: v2(27.268,20.901) 27.743,21.424 27.823,21.512 28.439,22.128 28.439,23.138 U1.39 ; v2(33.77,14.277) 33.77,14.144 B20.1
  Bottom Layer w0.153: v2(27.268,20.901) 27.855,20.674 27.939,20.591 27.945,20.585 28.225,20.305 28.225,16.305 29.43,15.1 30.836,15.1 31.326,14.61 33.28,14.61 33.601,14.289 v2@33.76,14.289
GPIO6.0: GPIO2.1 U1.22 | length 18.2
  Top Layer w0.15: GPIO2.1 10.402,35.814 11.956,35.814 12.864,34.907 13.027,34.907 14.237,33.697 16.03,33.697 16.059,33.726 17.481,33.726 18.653,32.553 18.688,32.519 cw(c18.471,31.017) 19.886,31.566 20.474,30.978 20.474,30.859 20.953,30.379 21.198,30.379 U1.22
GPIO6.3: GPIO2.4 J3.3 J4.3 U1.19 | length 38.5
  Top Layer w0.15: GPIO2.4 15.913,41.08 15.913,38.613 22.905,31.621 22.905,30.794 U1.19
  Top Layer w0.2: v3(18.896,48.56) 18.896,49.666 19.307,50.077 19.973,50.077 20.25,49.799 J4.3 23.404,48.747 27.714,48.747 28.702,49.735 J3.3
  Bottom Layer w0.2: GPIO2.4 14.057,44.567 14.057,45.893 14.955,46.791 14.967,46.791 15.067,46.891 15.66,46.891 16.997,48.228 16.997,48.443 17.114,48.56 v3(18.896,48.56)
GPIO6.4: GPIO2.5 U1.18 | length 18.3
  Top Layer w0.15: GPIO2.5 16.215,44.369 16.215,38.738 23.258,31.696 23.258,31.148 U1.18
GPIO6.5: GPIO1.6 U1.17 | length 21.7
  Top Layer w0.15: GPIO1.6 15.024,46.851 16.518,45.357 16.518,38.864 23.612,31.77 23.612,31.547 23.965,31.194 U1.17
GPIO6.6: GPIO1.7 U1.16 | length 22.5
  Top Layer w0.15: GPIO1.7 16.82,38.989 24.308,31.501 U1.16
JTAG_TEST/SBW_TCK: J1.6 PP1.7 PP2.4 U1.4 | length 34.8
  Top Layer w0.152: PP2.4 25.715,3.391 26.815,4.491 26.815,7.331 26.815,9.519 25.906,10.427 25.906,18.747 25.869,18.906 25.682,19.949 25.682,20.327 25.682,20.39 25.849,20.907 25.849,20.994 25.778,21.124 cw(c26.594,21.574) 25.906,22.203 25.979,22.913 26.223,23.188 26.224,23.244 26.26,25.486 26.26,25.597 25.098,27.27 25.056,27.312 24.934,27.394 24.389,28.022 24.292,28.233 cw(c24.863,28.495) 25.038,29.098 25.2,29.052 25.273,29.051 25.329,29.061 cw(c25.837,28.691) 26.07,29.275 26.491,29.107 27.568,28.267 ccw(c27.955,28.763) 28.29,28.231 29.267,28.848 29.298,28.879 U1.4
LED_GREEN: LEDs.1 R2.1 U1.28 | length 15
  Top Layer w0.153: LEDs.1@13.272,22.32 18.425,22.32 20.026,23.92 20.804,23.92 U1.28
  Top Layer w0.3: R2.1@9.677,20.444 11.432,22.199 LEDs.1
LED_RED: LEDs.3 R4.1 U1.30 | length 14.8
  Top Layer w0.153: LEDs.3 18.562,18.606 21.552,21.596 21.552,23.254 22.952,24.655 23.031,24.655 23.21,24.834 23.21,24.912 U1.30
  Top Layer w0.3: R4.1 13.605,18.606 LEDs.3
LED_YELLOW/BLUE: LEDs.2 R3.1 U1.29 | length 14.5
  Top Layer w0.153: LEDs.2@15.049,20.412 17.009,20.412 20.01,23.413 21.003,23.413 22.599,25.008 22.678,25.008 22.856,25.187 22.856,25.266 U1.29
  Top Layer w0.3: R3.1 12.514,20.403 LEDs.2
LEDG: D1.A D4.1 R2.2 | length 5.4
  Top Layer w0.4: D4.1@6.191,14.829 6.191,15.881 6.691,16.381 D1.A@6.691,18.158 ; D1.A@6.768,18.214 R2.2@8.054,19.5
LEDR: D3.A D4.4 R4.2 | length 9.1
  Top Layer w0.3: D4.4@5.059,13.698 5.059,13.718 6.177,13.718 7.445,12.45 9.067,12.45 10.152,13.535 D3.A@10.152,14.766
  Top Layer w0.4: D3.A@10.152,14.766 R4.2@11.438,16.052
LEDY/B: D2.A D4.2 R3.2 | length 5.3
  Top Layer w0.4: D4.2@7.043,13.977 7.598,13.977 8.668,15.048 8.668,16.196 D2.A R3.2
NetB1_2: B1.2 H3.01 | length 5.9
  Top Layer w0.2: B1.2 33.244,17.517 H3.01
NetB2_2: B2.2 H3.02 | length 4.2
  Top Layer w0.2: B2.2 35.017,16.75 H3.02
NetB3_2: B3.2 H3.03 | length 3.1
  Top Layer w0.2: B3.2 35.417,15.99 H3.03
NetB4_2: B4.2 H3.04 | length 2.9
  Top Layer w0.2: B4.2@34.454,15.003 H3.04@36.107,13.349
  Bottom Layer w0.2: H3.04 H3.04@36.107,13.349
NetB5_1: B5.1 B10.2 H6.04 | length 23.4
  Top Layer w0.15: B10.2 35.277,32.06 37.034,32.06 37.4,32.427 37.4,33.786 38.647,35.033 H6.04 40.262,37.235 40.262,44.667 38.756,46.173 B5.1@37.005,46.173
NetB5_2: B5.2 R9.1 | length 3.3
  Top Layer w0.2: R9.1@33.262,45.849 33.57,46.158 B5.2
NetB6_1: B6.1 R10.1 | length 4.9
  Top Layer w0.15: R10.1@33.254,43.624 35.177,45.547 B6.1
NetB6_2: B6.2 B9.1 H6.03 | length 20.3
  Top Layer w0.15: B9.1 34.938,32.407 34.938,33.718 35.323,34.103 37.173,34.103 37.683,34.613 37.683,37.196 H6.03 39.708,39.221 39.708,44.565 38.726,45.547 B6.2
NetB7_1: B7.1 H6.01 | length 14.3
  Top Layer w0.15: B7.1 33.447,32.26 33.517,32.26 33.719,32.462 33.745,32.462 34.331,33.048 34.331,33.969 35.069,34.708 36.912,34.708 37.058,34.853 37.058,41.651 H6.01
NetB8_1: B8.1 H6.02 | length 12.7
  Top Layer w0.15: B8.1 34.633,32.788 34.633,33.844 35.194,34.405 37.038,34.405 37.36,34.728 37.36,39.413 H6.02
NetB11_1: B11.1 B16.2 H5.04 | length 9.3
  Top Layer w0.15: B16.2@27.7,37.713 B11.1 34.014,37.713 H5.04
NetB11_2: B11.2 R7.1 | length 1.9
  Top Layer w0.2: B11.2 30.652,36.49 R7.1@31.586,36.49
NetB12_1: B12.1 R8.1 | length 1.4
  Top Layer w0.2: B12.1 31.669,40.121 R8.1@31.722,40.174
NetB12_2: B12.2 B15.2 H5.03 | length 7.5
  Top Layer w0.15: B15.2 28.648,38.224 31.667,38.224 B12.2 31.701,38.192 36.075,38.192 H5.03
NetB13_2: B13.2 H5.01 | length 9
  Top Layer w0.2: B13.2@27.502,42.202 35.07,42.202 35.085,42.187 H5.01@36.116,43.218
NetB14_2: B14.2 H5.02 | length 8.1
  Top Layer w0.15: B14.2 35.123,41.684 H5.02
NetB17_2: B17.2 H4.01 | length 17.5
  Top Layer w0.15: B17.2 39.1,9.683 40.561,11.144 40.561,18.466 H4.01
NetB18_2: B18.2 H4.02 | length 12.9
  Top Layer w0.153: B18.2 38.83,10.212 40.098,11.481 40.098,16.389 H4.02
NetB19_2: B19.2 H4.03 | length 8.2
  Top Layer w0.15: B19.2 38.197,10.703 39.625,12.131 39.625,14.322 H4.03
NetB20_2: B20.2 H4.04 | length 5.4
  Top Layer w0.153: B20.2 35.58,11.784 37.671,11.784 H4.04
NetJ2_1: J2.1 R12.1 | length 8.6
  Top Layer w0.2: v2(26.904,40.936) 27.066,40.936 27.194,40.809 27.572,40.809 27.992,40.389 R12.1
  Bottom Layer w0.2: v2(26.904,40.936) 26.904,39.364 26.91,39.358 26.91,37.558 27.635,36.833 27.635,34.263 J2.1
NetJ2_8: J2.8 R13.1 | length 8.1
  Top Layer w0.15: v4(23.369,37.112) 23.455,37.199 23.607,37.199 24.096,37.687 24.096,39.204 R13.1
  Bottom Layer w0.2: J2.8 19.861,34.639 20.111,34.889 20.241,34.889 20.358,35.006 20.358,35.093 22.377,37.112 v4(23.369,37.112)
"P2.6 / SD_CardDetect": GPIO1.5 J2.CD U1.9 | length 38.8
  Top Layer w0.15: GPIO1.5 13.228,49.974 15.082,51.827 17.918,51.827 18.527,51.218 18.527,50.782 18.228,50.483 18.192,50.483 17.884,50.174 17.884,40.904 24.076,34.711 24.321,34.711 25.98,33.052 25.98,32.7 27.533,31.148 27.985,31.148 28.338,31.501 U1.9
  Bottom Layer w0.15: J2.CD 18.761,34.639 21.308,37.186 21.438,37.186 v4(21.524,37.272)
"P4.0 / SD_CS": B4.1 J2.2 R11.1 SD.1 U1.26 | length 50.6
  Top Layer w0.2: 17.681,28.535 20.219,25.997 21.293,25.997 21.307,26.012 21.481,26.012 U1.26 U1.26@22.207,26.738 ; v2(32.998,15.239) 33.058,15.178 33.819,15.178 33.844,15.153 B4.1
  Top Layer w0.254: SD.1 17.681,28.535 17.681,27.742 18.157,27.265 v3(18.157,27.256)
  Top Layer w0.5: v3(13.92,25.963) 13.92,25.991 14.162,26.232 14.162,26.94 R11.1
  Bottom Layer w0.15: J2.2 26.461,33.739 27.131,33.068 27.233,33.068 27.629,32.672
  Bottom Layer w0.2: SD.1 17.661,29.383 17.718,29.44 17.953,29.44 18.024,29.51 18.024,29.534 18.57,30.08 19.098,30.08 20.175,30.196 20.778,30.393 21.651,30.393 24.675,29.804 24.733,29.746 25.02,29.459 25.186,29.459 26.683,30.957 ; 27.629,32.672 27.629,31.902 26.683,30.957 ; v2(32.998,15.239) 33.844,16.085 33.844,23.796 28.909,28.731 28.909,29.423 28.219,30.113 27.946,30.113 27.878,30.046 27.285,30.046 27.1,30.231 27.1,30.54 26.683,30.957
  Bottom Layer w0.3: v3(13.92,25.963) 15.389,27.432 16.105,27.432 16.332,27.204 17.334,27.204 17.386,27.256 v3(18.157,27.256)
"P6.1 / BMP_INT": GPIO2.2 U1.21 U2.7 | length 27.4
  Top Layer w0.15: GPIO2.2 9.649,38.549 12.989,35.209 14.189,35.209 14.501,35.522 16.54,35.522 18.62,33.442 19.612,32.807 cw(c18.471,31.017) 20.226,32.211 20.473,31.848 20.561,31.76 20.754,31.76 20.783,31.789 21.22,31.789 21.992,31.016 21.992,30.453 21.974,30.435 21.974,30.311 U1.21
  Top Layer w0.3: U2.7 4.198,35.531 3.886,35.842 3.886,36.16 4.36,36.634 4.78,36.634 5.166,37.019 v3(5.247,37.019)
  Bottom Layer w0.2: v3(5.247,37.019) 5.247,37.083 6.33,38.165 6.33,38.671 7.243,39.584 8.831,39.584 9.406,40.159 GPIO2.2
"P6.2 / BMP_ADR": GPIO2.3 U1.20 U2.5 | length 26.3
  Top Layer w0.15: GPIO2.3 11.602,41.799 12.267,41.799 22.295,31.771 22.295,30.697 U1.20
  Top Layer w0.3: U2.5 5.489,36.026 6.046,36.584 6.22,36.584 v3(6.277,36.641)
  Bottom Layer w0.2: v3(6.277,36.641) 6.308,36.61 7.425,36.61 10.587,39.771 10.587,41.097 GPIO2.3
Reset/SBW_TDIO: C5.2 J1.8 PP1.8 PP2.1 R1.1 U1.5 | length 36.5
  Top Layer w0.152: PP2.1 23.067,3.391 23.596,2.862 24.138,2.862 24.196,2.919 24.738,2.919 24.796,2.862 26.078,2.862 27.415,4.199 27.415,5.391 27.779,5.391 29.255,6.867 J1.8 ; 26.22,15.308 26.583,13.268 27.286,12.824 29.229,10.882 29.229,10.534 29.56,10.203 29.22,9.864 J1.8@29.22,7.348 ; 26.22,15.308 cw(c26.839,15.418) 26.211,15.418 26.211,18.848 26.173,19.032 25.986,20.075 25.986,20.201 26.171,20.779 26.171,20.866 26.154,21.12 26.106,21.179 cw(c26.594,21.574) 26.166,22.034 26.178,22.045 26.197,22.064 26.215,22.127 26.314,22.827 26.32,22.836 26.357,22.881 26.418,22.942 26.462,22.986 26.61,23.133 26.61,25.385 26.61,25.476 26.88,26.056 26.944,26.12 27.069,26.237 v2(27.582,26.721) ; v2(27.955,28.763) 28.456,29.26 28.661,29.463 28.787,29.463 28.981,29.269 U1.5
  Bottom Layer w0.152: v2(27.582,26.721) 26.888,27.57 26.888,27.624 26.888,27.696 26.933,27.741 v2(27.955,28.763)
SD_CLK: B3.1 J2.5 SD.2 U1.25 | length 41
  Top Layer w0.15: SD.2 15.125,31.179 15.724,30.579 17.039,30.579 19.835,27.783 ; v4(20.704,28.085) 20.137,28.085 19.835,27.783 ; U1.25 21.222,26.46 21.157,26.46 19.835,27.783
  Top Layer w0.2: v2(31.939,16.025) 31.956,16.007 32.703,16.007 B3.1
  Bottom Layer w0.15: SD.2 17.343,31.179 18.602,32.438 20.231,32.438 20.564,32.771 20.768,32.844 22.281,32.859 23.161,33.739 J2.5 ; v4(20.704,28.085) 20.691,28.673 20.691,28.674 20.691,28.738 20.748,28.795 21.234,29.089 21.294,29.089 21.428,29.055 21.469,29.045 21.499,29.016 21.502,29.013 22.255,28.169 22.255,27.728 22.77,27.212 25.225,27.212 25.269,27.168 28.06,24.377 28.066,24.326 28.908,17.234 28.944,17.197 30.117,16.025 v2(31.939,16.025)
SD_MISO: B2.1 J2.7 R14.1 SD.3 U1.24 | length 44.7
  Top Layer w0.15: R14.1 11.406,30.336 11.406,30.966 13.241,32.801 SD.3 14.796,32.975 16.172,31.598 16.6,31.598 18.841,29.358 20.805,29.358 U1.24@21.137,29.026 ; v2(20.061,28.829) 20.635,29.026 U1.24@21.137,29.026 ; U1.24 U1.24@21.137,29.026
  Top Layer w0.2: v2(31.084,16.75) B2.1
  Bottom Layer w0.15: SD.3 14.125,32.091 15.659,32.091 15.849,31.901 17.637,31.901 18.477,32.74 19.962,32.74 20.961,33.739 J2.7
  Bottom Layer w0.2: v2(20.061,28.829) 20.799,29.209 21.127,29.407 21.174,29.435 21.255,29.435 21.644,29.339 21.684,29.3 21.74,29.238 22.582,28.293 22.582,27.863 22.906,27.54 25.361,27.54 27.649,25.252 28.497,24.464 28.542,24.419 29.836,16.854 29.94,16.75 v2(31.084,16.75)
SD_MOSI: B1.1 J2.3 R15.1 SD.4 U1.23 | length 52.9
  Top Layer w0.15: R15.1 11.445,32.955 SD.4 12.329,33.887 13.619,33.887 14.162,33.344 14.854,33.344 16.297,31.901 17.499,31.901 17.559,31.901 18.442,31.929 cw(c18.471,31.017) 19.339,30.735 19.339,30.443 19.644,30.138 20.216,29.66 20.278,29.66 21.21,29.66 22.217,28.654 22.197,28.673 v4(23.718,28.654)
  Top Layer w0.2: v2(30.329,17.845) 30.536,17.517 B1.1
  Bottom Layer w0.15: SD.4 13.585,34.771 17.21,38.396 23.971,38.396 24.059,38.308 24.059,36.478 25.411,35.126 25.411,34.789 25.086,34.464 J2.3 ; v4(23.718,28.654) 23.741,28.051 23.778,28.013 23.788,28.003 23.822,27.969 24.8,27.87 ccw(c24.863,28.495) 24.863,27.867 25.496,27.867 27.784,25.579 ccw(c28.229,26.022) 27.802,25.562 28.675,24.749 28.87,24.554 v2(30.329,17.845)
UCA0_CLK/JTAG_TMS: J1.4 PP1.6 U1.33 UCA0.2 | length 23.6
  Top Layer w0.15: U1.33 23.82,23.401 23.82,21.73 24.883,20.667 24.883,19.022 25.056,18.849 25.056,18.661 24.883,18.488 24.883,17.717 22.22,15.054 22.22,13.229 22.22,12.573 24.399,10.394 24.399,7.331 24.399,5.26 24.796,4.863 25.241,4.863 25.769,5.391 PP1.6@26.215,5.391
UCA0_RX/MISO/JTAG_TDI: J1.2 J5.2 PP1.5 U1.32 UCA0.3 | length 35.3
  Top Layer w0.15: UCA0.3 19.765,12.083 19.765,15.95 23.283,19.469 23.283,19.746 23.72,20.183 23.72,20.622 23.148,21.194 23.148,23.436 U1.32 ; UCA0.3@20.436,11.979 21.701,10.714 J1.2@21.701,7.344 ; J1.2 21.755,6.675 22.231,6.199 22.744,6.199 23.249,5.694 23.249,4.832 24.168,3.913 24.633,3.913 24.639,3.919 25.043,3.919 PP1.5@25.615,4.491
  Bottom Layer w0.15: J5.2 15.352,12.848 18.106,12.848 19.505,11.449 20.398,11.449 UCA0.3
UCA0_STE/JTAG_TCK: J1.5 PP1.4 U1.34 UCA0.1 | length 20.2
  Top Layer w0.15: U1.34 24.646,23.546 24.142,23.042 24.142,22.605 24.211,22.535 24.211,21.766 25.215,20.762 25.215,19.118 25.359,18.975 25.359,16.355 24.018,15.014 24.018,11.597 25.433,10.182 J1.5@25.433,7.371 ; PP1.4@25.015,5.391 25.505,5.881 J1.5
UCA0_TX/MOSI/JTAG_TDO: J1.1 J5.3 PP1.1 U1.31 UCA0.4 | length 27.9
  Top Layer w0.15: J5.3 16.254,10.057 16.674,9.637 UCA0.4 ; J1.1@20.505,7.75 UCA0.4 ; U1.31@23.716,24.753 22.846,23.883 22.846,21.069 23.418,20.497 23.418,20.308 22.981,19.872 22.85,19.741 22.85,19.464 18.619,15.232 UCA0.4
  Top Layer w0.2: J1.1@20.505,7.25 20.505,6.915 22.03,5.391 PP1.1@22.615,5.391
UCB0_CLK: B8.2 U1.2 | length 2.7
  Top Layer w0.15: U1.2 30.872,29.026 B8.2
UCB0_SCL/MISO: B10.1 U1.48 U2.2 | length 32.3
  Top Layer w0.15: U2.2 6.633,33.767 6.778,33.767 v3(6.864,33.681) ; v2(24.863,28.495) 25.506,28.151 25.584,28.117 ccw(c25.837,28.691) 25.639,28.096 29.811,26.714 29.896,26.714 29.94,26.758 30.263,27.082 30.86,27.082 U1.48 31.213,28.002 31.218,28.002 B10.1
  Bottom Layer w0.15: v3(6.864,33.681) 6.951,33.681 10.718,29.914 11.374,29.914 12.086,29.202 14.788,29.202 15.878,28.112 16.386,28.112 16.614,27.884 17.053,27.884 17.574,28.405 17.824,28.405 18.654,29.235 18.654,29.273 18.831,29.45 19.916,29.45 21.039,29.763 21.39,29.763 24.414,29.174 24.483,29.105 24.571,29.017 v2(24.863,28.495)
UCB0_SDA/MOSI: B9.2 U1.1 U2.4 | length 32.8
  Top Layer w0.15: U2.4 5.993,35.858 6.201,35.858 6.252,35.909 6.44,35.909 7.725,34.624 v3(7.748,34.624) ; v2(25.837,28.691) 26.404,28.275 27.674,27.874 ccw(c27.955,28.763) 27.758,27.852 29.841,27.406 29.947,27.406 U1.1 32.519,29.979 B9.2
  Bottom Layer w0.15: v3(7.748,34.624) 7.692,34.568 7.692,34.024 12.211,29.505 14.913,29.505 16.004,28.414 16.512,28.414 16.739,28.187 16.928,28.187 17.839,29.098 18.089,29.098 18.351,29.36 18.351,29.398 18.706,29.752 19.791,29.752 20.326,29.883 20.914,30.065 21.515,30.065 24.494,29.486 24.539,29.477 24.857,29.16 25.065,29.089 cw(c24.863,28.495) 25.156,29.05 v2(25.837,28.691)
UCB0_STE: B7.2 U1.3 | length 3.6
  Top Layer w0.15: U1.3 30.506,29.39 B7.2
UCB1_CLK: B14.1 U1.14 UCB1.2 | length 31.1
  Top Layer w0.15: UCB1.2 17.025,34.609 18.797,32.837 18.834,32.8 cw(c18.471,31.017) 20.08,31.868 20.157,31.723 20.422,31.458 20.5,31.458 20.968,31.233 20.973,31.233 v3(21.001,31.261) ; v4(23.531,37.869) 23.531,37.99 23.794,38.253 23.794,40.478 23.927,40.611 25.691,40.611 26.644,41.564 27.752,41.564 27.772,41.584 27.822,41.584 27.872,41.634 B14.1 ; U1.14 25.026,32.162 25.379,31.809 25.379,31.233 25.228,31.082 v3(25.228,30.96)
  Bottom Layer w0.15: UCB1.2 14.879,35.638 17.11,37.869 v4(23.531,37.869) ; v3(21.001,31.261) v3(25.228,30.96)
UCB1_MISO/SCL: B16.1 U1.12 UCB1.4 | length 14.9
  Top Layer w0.15: v3(27.076,32.443) 27.076,33.114 26.555,33.635 26.555,36.623 27.15,37.217 B16.1
  Bottom Layer w0.15: UCB1.4 18.643,31.189 19.641,31.189 20.013,31.561 20.783,31.789 21.22,31.789 23.335,31.649 23.46,31.649 23.796,31.984 26.618,31.984 v3(27.076,32.443)
UCB1_MOSI/SDA: B15.1 U1.13 UCB1.3 | length 20.6
  Top Layer w0.15: UCB1.3 17.966,32.813 18.511,32.268 18.549,32.229 cw(c18.471,31.017) 19.626,31.396 19.849,30.716 19.914,30.716 v3(19.946,30.748) ; U1.13 25.379,32.558 26.098,31.84 26.098,31.543 v3(26.184,31.457) ; v4(26.508,32.936) 26.508,33.058 26.253,33.313 26.253,37.444 26.931,38.122 28.047,38.122 28.097,38.172 B15.1
  Bottom Layer w0.15: v3(19.946,30.748) 21.787,30.72 25.01,30.433 25.303,30.413 25.427,30.413 25.903,30.889 25.903,31.054 26.184,31.335 v3(26.184,31.457) ; v4(25.37,32.917) 25.39,32.936 v4(26.508,32.936)
UCB1_STE: B13.1 U1.15 UCB1.1 | length 31.1
  Top Layer w0.15: UCB1.1 16.297,36.405 18.959,33.743 19.559,33.743 v3(20.987,32.316) ; v3(22.249,35.627) 23.93,33.946 v3(23.93,32.875) 24.016,32.789 24.016,32.511 U1.15 ; v3(23.25,36.34) 21.227,38.362 21.227,41.541 21.315,41.629 26.281,41.629 26.518,41.866 26.549,41.866 26.793,42.11 26.843,42.11 26.893,42.16 B13.1
  Bottom Layer w0.15: v3(20.987,32.316) 21.587,32.287 23.669,32.287 23.843,32.462 23.843,32.789 v3(23.93,32.875) ; v3(22.249,35.627) 22.875,36.254 23.164,36.254 v3(23.25,36.34)
Vbat: H1.5 R5.2 | length 3.2
  Top Layer w0.25: R5.2@33.133,23.513 35.514,23.513 H1.5
Vbat/2: C3.2 R5.1 R6.2 U1.43 | length 6.3
  Top Layer w0.2: U1.43 30.893,23.513 31.233,23.513 C3.2@31.233,19.584
pads on no net: J2. U1.10 U1.11 U1.37

## Polygon pours and split planes (outlines as drawn)
GND on Top Layer "Top GND" (solid, remove dead copper, pour order 5): 47.596,8 cw(c28,28) 47.596,48 47.6,48 40.913,48 40.913,8
GND on Bottom Layer "Bottom GND" (solid, pour order 6): 47.596,8 cw(c28,28) 47.596,48 47.6,48 40.913,48 40.913,8

## Keep-outs
Keep-Out Layer:
  the board outline again, w0.25

## Silkscreen, mask and mechanical layers (free items; w line width, h text height)
Top Overlay:
  text "SERVOS" at 37.909,53.561 h0.8 r180
  text "2.6" at 18.182,51.998 h0.8 r45
  text "2.7" at 13.341,49.739 h0.8 r45
  text "NC NC" at 10.052,46.364 h0.8 r45
  text "3.6" at 8.594,44.85 h0.8 r75
  text "3.7" at 6.735,42.991 h0.8 r75
  text "2.3" at 4.824,41.201 h0.8 r60
  text "6.0 - 6.4" at 10.762,38.3 h0.8 r45
  text "STE" at 14.3,37.159 h0.8 r45
  text "CLK" at 16.1,35.396 h0.8 r45
  text "SIMO" at 8.389,34.854 h0.8 r315
  text "SIMO" at 17.949,33.51 h0.8 r45
  text "SOMI" at 10.758,32.384 h0.8 r315
  text "SOMI" at 19.847,31.637 h0.8 r45
  text "CLK" at 13.098,30.127 h0.8 r315
  text "CS" at 17.731,27.432 h0.8 r45
  text "5.1" at 19.424,25.324 h0.8 r350
  text "5.2" at 21.205,23.49 h0.8 r350
  text "2.2" at 14.358,23.365 h0.8
  text "5.3" at 23.072,21.556 h0.8 r350
  text "2.1" at 16.282,21.455 h0.8
  text ".version" at 6.615,19.865 h1.4 r45
  text "2.0" at 18.036,19.655 h0.8
  text "MCU PCB" at 2.901,19.099 h1.4 r45
  text "v" at 5.386,18.713 h1.4 r45
  text "STE" at 22.984,16.149 h0.8 r90
  text "CLK" at 21.314,14.282 h0.8 r90
  text "RX/" at 18.619,12.818 h0.8 r90
  text "SOMI" at 19.599,12.751 h0.8 r90
  text "SIMO" at 17.234,10.295 h0.8 r90
  text "TX/" at 16.006,10.272 h0.8 r90
  text "3V3" at 37.814,3.109 h0.8 r30
  text "GND" at 40.011,3.075 h0.8 r30
Bottom Overlay:
  text "Kessel Runners" at 2.274,25.973 h1.52 r135
Mechanical 1:
  text "Battery cutout" at 46.172,24.284 h1.52 r90
Mechanical 15:
  lines w0.254: 41.46,9.025 49.46,9.025 49.46,47.025 41.46,47.025 41.46,9.025